# Altium PCB RaspberryPi_Pico.PcbDoc
Units mm, origin at the board's own origin, x right, y up, seen from the top; angles counter-clockwise.
Board outline 21 x 53.37 mm, 4 copper layers (Top Layer, Int1 (GND), Int2 (PWR), Bottom Layer), stack 1.334 mm thick; 52 components, 61 nets, 361 pads, 107 vias.
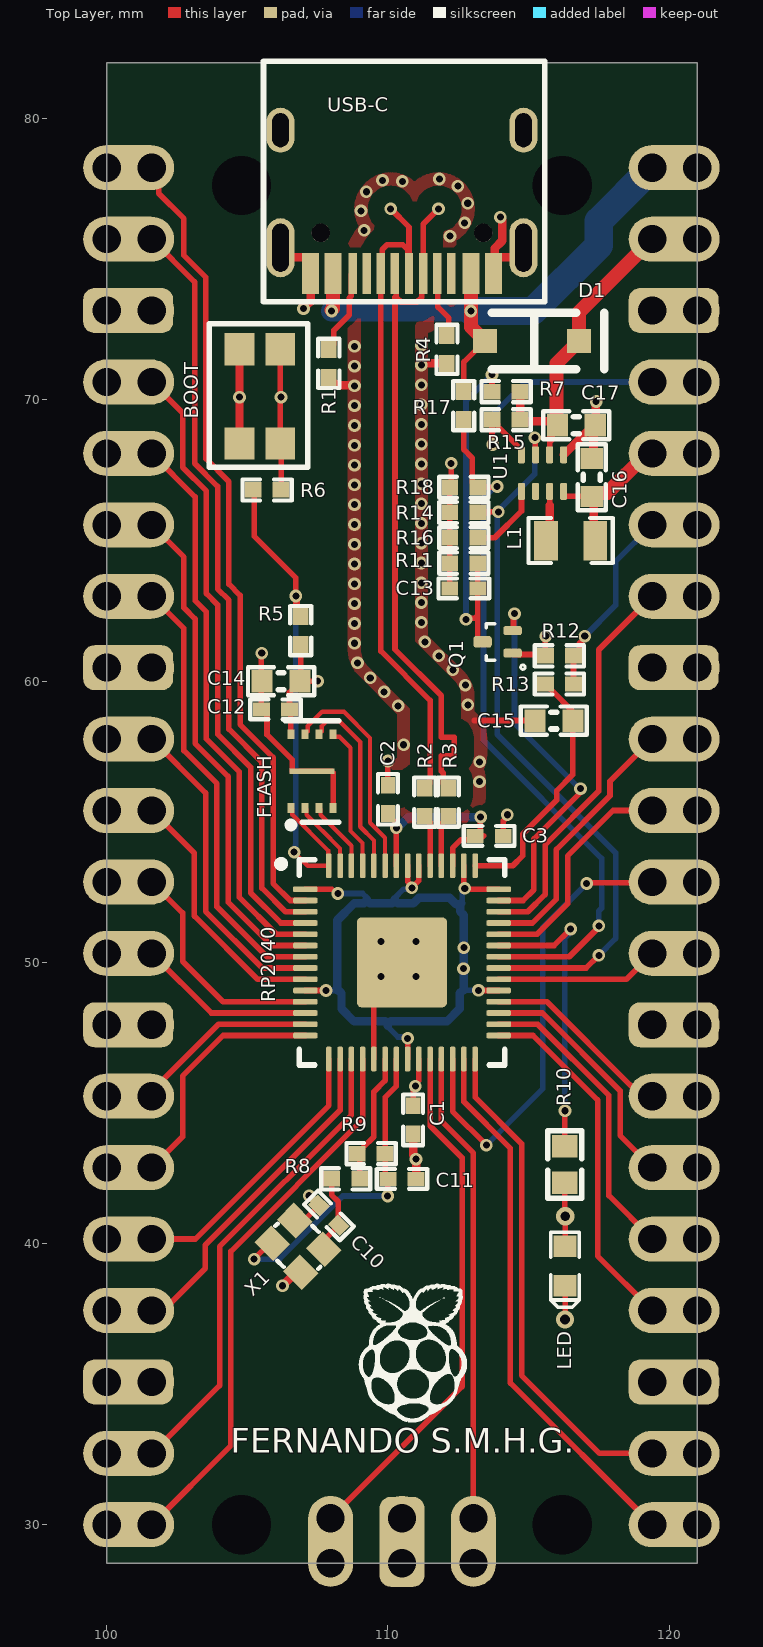
[diagram p0: Top Layer view]
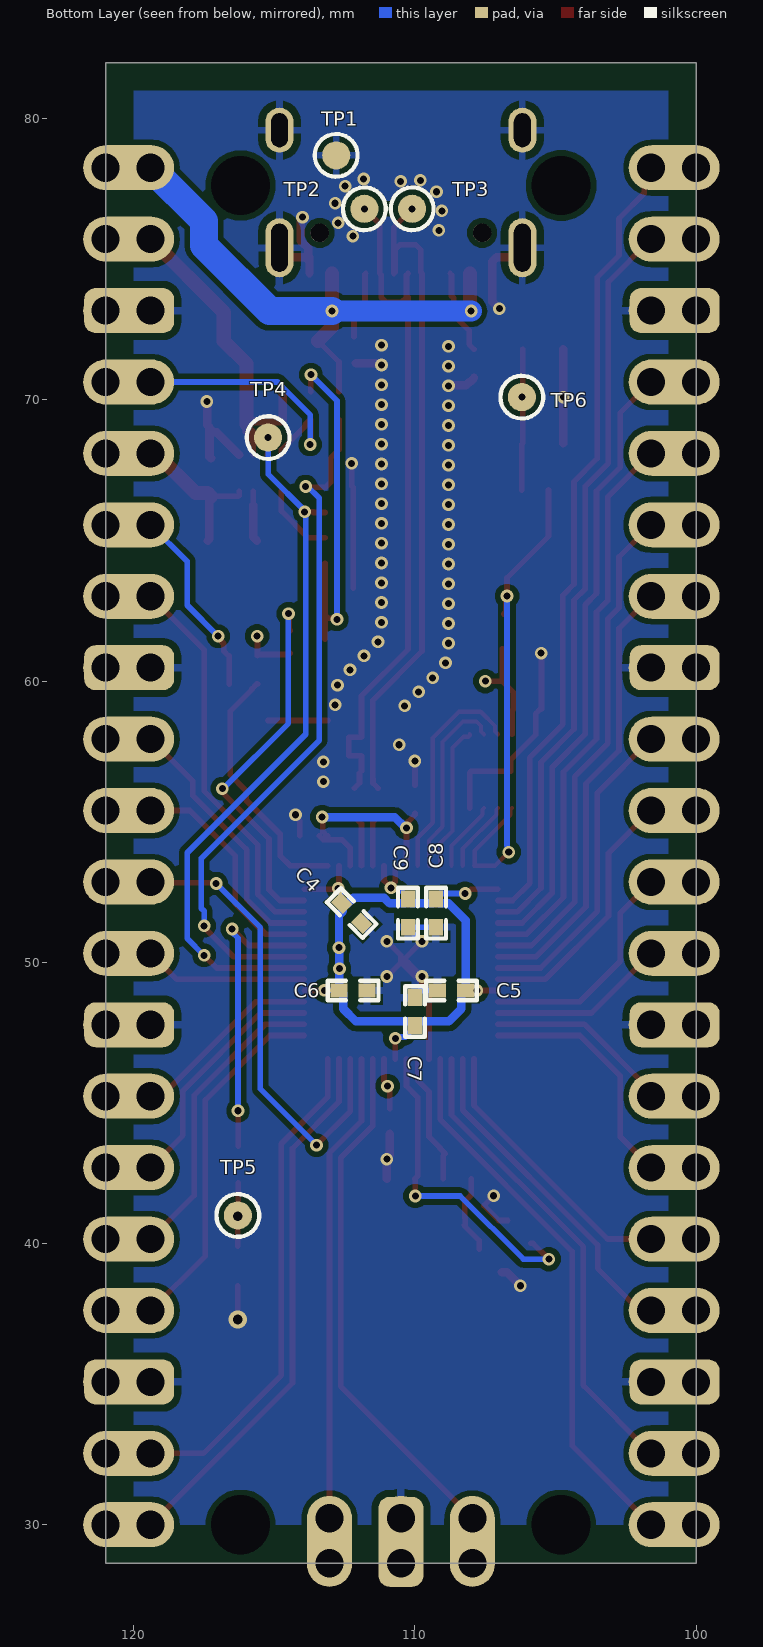
[diagram p1: Bottom Layer view, seen from below]
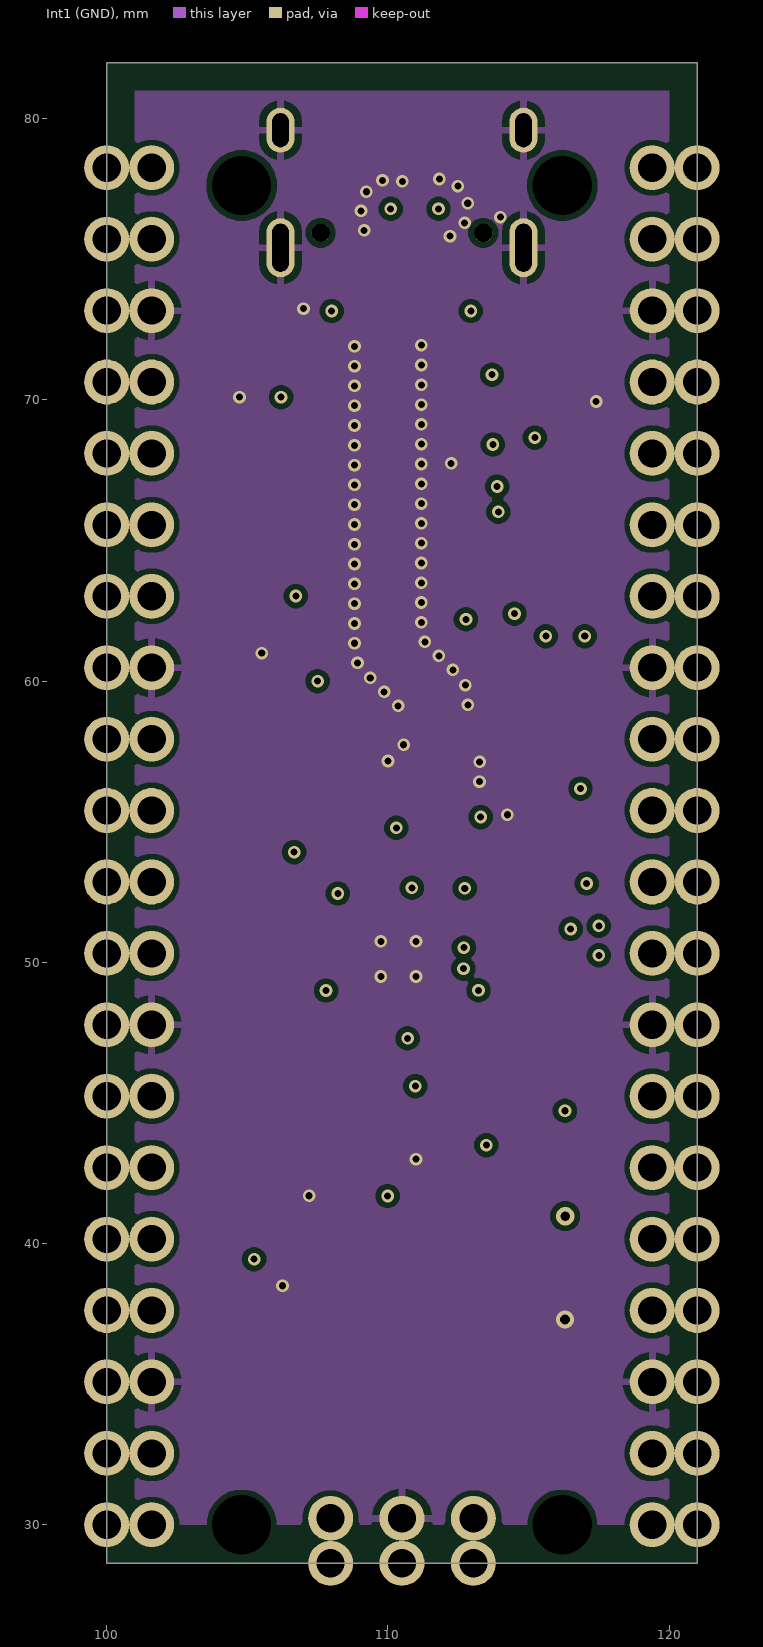
[diagram p2: Int1 (GND)]
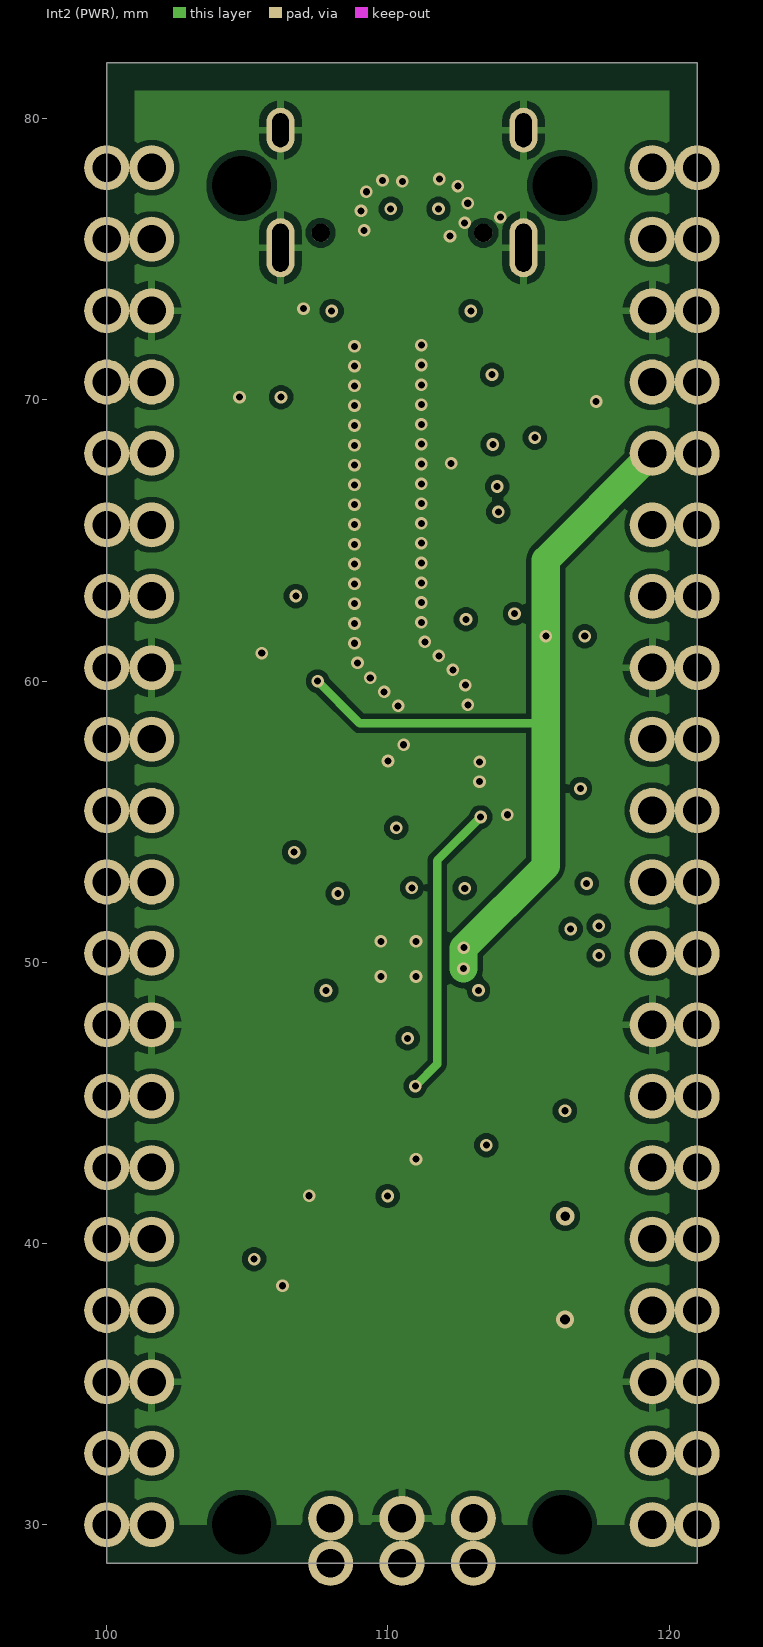
[diagram p3: Int2 (PWR)]
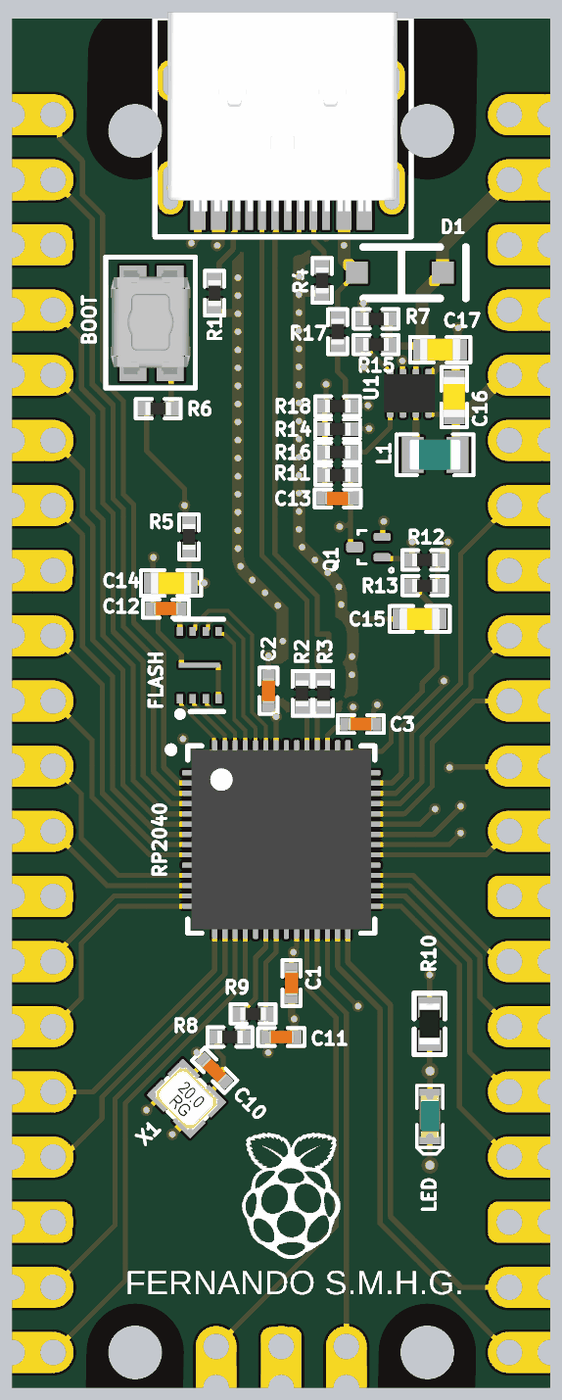
[diagram p4: 3D render of the assembled board from above, using the file's embedded part models]
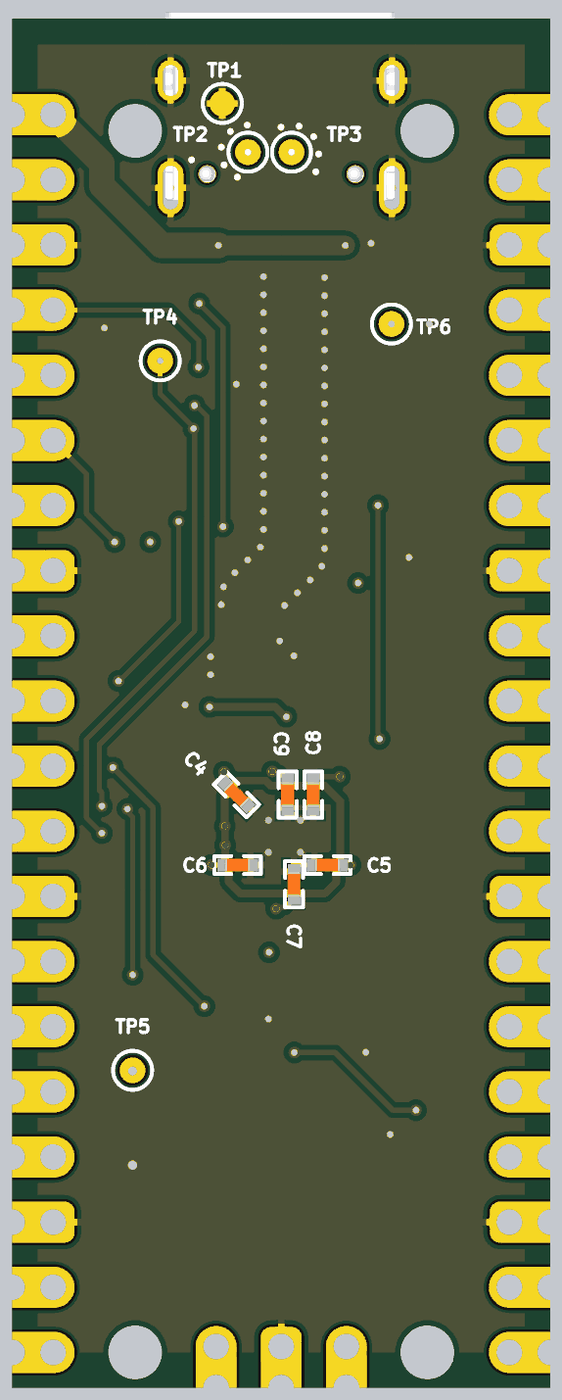
[diagram p5: 3D render of the assembled board from below, using the file's embedded part models]

## Layer stack, top to bottom
Top Solder: solder mask 0.0254, SM-001, Dk 4
Top Layer: signal copper 0.035
Dielectric 1: prepreg 0.1295, PP-017, Dk 4.3
Dielectric 2: prepreg 0.1295, PP-017, Dk 4.3
Int1 (GND): signal copper 0.0175
Dielectric 3: core 0.7112, Core-039, Dk 4.8
Int2 (PWR): signal copper 0.0175
Dielectric 4: prepreg 0.1295, PP-017, Dk 4.3
Dielectric 5: prepreg 0.1295, PP-017, Dk 4.3
Bottom Layer: signal copper 0.035
Bottom Solder: solder mask 0.0254, SM-001, Dk 4

## Board outline
100,28.63 100,82 121,82 121,28.63

## Design rules (kind name [scope] priority, off if disabled: settings)
Clearance Clearance_3 [InComponent('U1')] p1: gap=0.127 ignorepadtopadclearanceinfootprint=TRUE
Clearance Clearance_2 [InNet('VIN')] p2 off: gap=0.8 ignorepadtopadclearanceinfootprint=TRUE
Clearance Clearance_1 [All] p3: gap=0.2 ignorepadtopadclearanceinfootprint=TRUE
Clearance [All] p4 off: gap=0.2 ignorepadtopadclearanceinfootprint=TRUE
ComponentClearance [All] p1 off: gap=0.254 collisioncheckmode=3 verticalgap=0.254 showdistances=FALSE
DiffPairsRouting [InDifferentialPair('DiffPair')] p1: maxlimit=0.254 minlimit=0.089 mostfreqgap=0.2 toplayer_minwidth=0.089 toplayer_maxwidth=0.381 toplayer_prefwidth=0.15 midlayer1_minwidth=0.089 midlayer1_maxwidth=0.381 midlayer1_prefwidth=0.15 midlayer2_minwidth=0.089 midlayer2_maxwidth=0.381 midlayer2_prefwidth=0.15 bottomlayer_minwidth=0.089 bottomlayer_maxwidth=0.381 bottomlayer_prefwidth=0.15 maxuncoupledlength=12.7
HoleSize [All] p1: absolutevalues=TRUE maxlimit=6 minlimit=0.025 maxpercent=80.000 minpercent=20.000
MatchedLengths usb [All] p1 off: tolerance=1 checknetsindiffpair=FALSE checkdiffpairvsdiffpair=TRUE checkxsignals=TRUE checkothers=TRUE
MinimumSolderMaskSliver [All] p1 off: minsoldermaskwidth=0.254
PlaneClearance [All] p1: clearance=0.254
PolygonConnect VIN [InNet('VIN')] p1: connectstyle=Direct reliefconductorwidth=0.254 reliefentries=4 polygonreliefangle="90 Angle" airgapwidth=0.254
PolygonConnect Connectors [HasFootprint('B06B-JWPF-SK-R')] p2: connectstyle=Direct reliefconductorwidth=0.254 reliefentries=4 polygonreliefangle="90 Angle" airgapwidth=0.254
PolygonConnect Connectors_1 [HasFootprint('B08B-JWPF-SK-R')] p3: connectstyle=Direct reliefconductorwidth=0.254 reliefentries=4 polygonreliefangle="90 Angle" airgapwidth=0.254
PolygonConnect Default [All] p4 off: connectstyle=Relief reliefconductorwidth=0.254 reliefentries=4 polygonreliefangle="90 Angle" airgapwidth=0.254
PolygonConnect vbus [InNet('NetQ1_1')] p5: connectstyle=Direct reliefconductorwidth=0.254 reliefentries=4 polygonreliefangle="90 Angle" airgapwidth=0.254
PolygonConnect vbus_1 [InNet('NetC9_1')] p6: connectstyle=Direct reliefconductorwidth=0.254 reliefentries=4 polygonreliefangle="90 Angle" airgapwidth=0.254
PolygonConnect VIAS [IsVia] p7: connectstyle=Direct reliefconductorwidth=0 reliefentries=4 polygonreliefangle="90 Angle" airgapwidth=0
PolygonConnect PolygonConnect_1 [All] p8: connectstyle=Relief reliefconductorwidth=0.254 reliefentries=4 polygonreliefangle="90 Angle" airgapwidth=0.254
RoutingVias [All] p1: holewidth=0.3 width=0.5 viastyle="Through Hole" minholewidth=0.25 minwidth=0.45 maxholewidth=6.3 maxwidth=1.27
SilkToSilkClearance [All] p1 off: silktosilkclearance=0.254
SilkToSolderMaskClearance [IsPad] p1 off: minsilkscreentomaskgap=0.254 clearancetoexposedcopper=TRUE
SolderMaskExpansion SolderMaskExpansion_1 [IsVia] p1: expansion=0.102 istentingtop=TRUE
SolderMaskExpansion [All] p2: expansion=0.102 istentingtop=FALSE
Width [All] p1: maxlimit=1 minlimit=0.127 preferedwidth=0.2
23 further rules are at their usual default settings.

## Classes and differential pairs
differential pair P: +P_P -P_N

## Components (designator, comment, footprint, x,y, rotation, side; value= is the part's Value field where it differs from the comment)
BOOT "EVP-AA002K" MiniSwitch 106.172,68.453 r90 top
C1 "100nF" C0402 110.9,44.4 r90 top value=100pF
C2 "100nF" C0402 110,55.8 r270 top value=100pF
C3 "1uF" C0402 113.6,54.5 r180 top value=100pF
C4 "1uF" C0402 112.25,51.75 r45 bottom value=100pF
C5 "100nF" C0402 108.7,49 r180 bottom value=100pF
C6 "100nF" C0402 112.2,49 r0 bottom value=100pF
C7 "100nF" C0402 110,48.25 r270 bottom value=100pF
C8 "100nF" C0402 109.25,51.75 r90 bottom value=100pF
C9 "100nF" C0402 110.25,51.75 r90 bottom value=100pF
C10 "15pF" C0402 107.9,41 r135 top value=100pF
C11 "15pF" C0402 110.5,42.3 r0 top value=100pF
C12 "100nF" C0402 106,59 r0 top value=100pF
C13 "1nF" C0402 112.7,63.3 r0 top value=100pF
C14 "2.2uF" C0603 106.2,60 r0 top value=100pF
C15 "2.2uF" C0603 115.9,58.6 r0 top value=100pF
C16 "10uF" C0603 117.25,67.25 r270 top value=100pF
C17 "4.7uF" C0603 116.7,69.1 r180 top value=100pF
D1 "mbr120vlsft1g" SOD-123 113.45,72.1 r0 top locked
FLASH "GD25Q16CEIGR" GD25Q16CEIGR 106.55,55.488 r90 top
L1 "2.2uH" IND0805 116.5,65 r0 top value=120R/0.55A
LED "L0603G" LED_0603 116.3,39.2 r90 top
Q1 "dmg1012T" SOTFL3P40_120X120X55L30X32N 113.9,61.4 r180 top
R1 "5.1K" RES0402 107.9,71.3 r90 top value=0R
R2 "27.4R" RES0402 111.315,55.698 r90 top value=0R
R3 "27.4R" RES0402 112.149,55.698 r90 top value=0R
R4 "5.1K" RES0402 112.1,71.8 r270 top value=0R
R5 "DNP" RES0402 106.9,61.8 r270 top value=0R
R6 "1K" RES0402 105.7,66.8 r180 top value=0R
R7 "200K" RES0402 114.2,70.3 r0 top value=0R
R8 "1K" RES0402 108.5,42.3 r0 top value=0R
R9 "DNP" RES0402 109.4,43.2 r180 top value=0R
R10 "470R" RES0603R 116.287,42.811 r270 top value=0R
R11 "100K" RES0402 112.7,64.2 r0 top value=0R
R12 "200R" RES0402 116.1,60.9 r180 top value=0R
R13 "1R" RES0402 116.1,59.9 r180 top value=0R
R14 "100K" RES0402 112.7,66 r180 top value=0R
R15 "100K" RES0402 114.2,69.3 r0 top value=0R
R16 "267K" RES0402 112.7,65.1 r0 top value=0R
R17 "5.1K" RES0402 112.7,69.8 r90 top value=0R
R18 "5.1K" RES0402 112.7,66.9 r0 top value=0R
RP2040 "RP2040" RP2040 110.5,50 r0 top locked
RPI_PICO "DNP" "RPI PICO" 100,30 r0 top locked
TP1 "DNP" TP_SMD_1.0mm 112.8,78.7 r180 bottom
TP2 "DNP" TP_SMD_1.0mm 111.8,76.8 r90 bottom
TP3 "DNP" TP_SMD_1.0mm 110.1,76.8 r90 bottom
TP4 "DNP" TP_SMD_1.0mm 115.223,68.663 r0 bottom
TP5 "DNP" TP_SMD_1.0mm 116.3,41 r90 bottom
TP6 "DNP" TP_SMD_1.0mm 106.2,70.1 r90 bottom
U1 "TPS62840DLCR" TPS62840 115.5,67.4 r270 top
USB-C "TYPE-C-31-M-12" TYPE-C-31-M-12 113.75,74.5 r180 top locked
X1 "12MHz" XTAL_2016 106.8,39.9 r315 top value=32MHz

## Footprints (in the part's own frame and the unit in brackets; to place one, negate y for a bottom-side part, rotate by r counter-clockwise, add the part's x,y. Pads: shape width x height; smd on the part's side, far side on the other; paste and mask are expansions set on the pad)
C0402 [mm]
  rect 0.6x0.5 smd: 1(-0.5,0) 2(0.5,0)
  silkscreen extent -0.9,-0.35 0.9,0.35, body extent -0.51,-0.25 0.51,0.25, height 0.5
C0603 [mm]
  rect 0.75x0.8 smd: 1(-0.675,0) 2(0.675,0)
  silkscreen extent -1.17,-0.5 1.17,0.5, body extent -0.8,-0.44 0.8,0.43, height 0.8
GD25Q16CEIGR [mm] "Flash SPI USON8 Package"
  rect 0.35x0.25 smd: 1(0,0) 2(0,-0.5) 3(0,-1) 4(0,-1.5) 5(2.625,-1.5) 6(2.625,-1) 7(2.625,-0.5) 8(2.625,0)
  rect 0.2x1.6 smd: 4(1.312,-0.75)
  silkscreen extent -0.7,-1.7 3.1,0.2, body extent -0.18,-1.74 2.82,0.26, height 0.45
IND0805 [mm] "Inductor 0805 reflow soldering"
  rect 0.85x1.4 smd: 1(-0.875,0) 2(0.875,0)
  silkscreen extent -1.5,-0.8 1.5,0.8, body extent -1,-0.59 1,0.6, height 0.99
LED_0603 [mil]
  rect 30x32 smd: 1(-27.5,0) 2(27.5,0)
  silkscreen extent -58,-20 48,20, body extent -32,-16 32,16, height 24
MiniSwitch [mm]
  rect 1.15x1.05 smd: 1(0,1.45) 1(3.35,1.45) 2(0,0) 2(3.35,0)
  silkscreen extent -0.85,-0.98 4.25,2.52, body extent -0.43,-0.78 3.87,2.33, height 1.7
RES0402 [mm]
  rect 0.6x0.55 smd: 1(-0.5,0) 2(0.5,0)
  silkscreen extent -0.87,-0.38 0.88,0.38, body extent -0.5,-0.25 0.5,0.25, height 0.3
RES0603R [mm] "resistor 0603 reflow soldering"
  rect 0.8x0.9 smd: 1(-0.65,0) 2(0.65,0)
  silkscreen extent -1.2,-0.6 1.2,0.6, body extent -0.8,-0.4 0.8,0.4, height 0.45
RP2040 [mm]
  rrect50% 0.875x0.2 smd: 1(-3.437,2.6) 2(-3.437,2.2) 3(-3.437,1.8) 4(-3.437,1.4) 5(-3.437,1) 6(-3.437,0.6) 7(-3.437,0.2) 8(-3.437,-0.2) 9(-3.437,-0.6) 10(-3.437,-1) 11(-3.437,-1.4) 12(-3.437,-1.8) 13(-3.437,-2.2) 14(-3.437,-2.6) 29(3.437,-2.6) 30(3.437,-2.2) 31(3.437,-1.8) 32(3.437,-1.4) 33(3.437,-1) 34(3.437,-0.6) 35(3.437,-0.2) 36(3.437,0.2) 37(3.437,0.6) 38(3.437,1) 39(3.437,1.4) 40(3.437,1.8) 41(3.437,2.2) 42(3.437,2.6)
  rrect50% 0.2x0.875 smd: 15(-2.6,-3.437) 16(-2.2,-3.437) 17(-1.8,-3.437) 18(-1.4,-3.437) 19(-1,-3.437) 20(-0.6,-3.437) 21(-0.2,-3.437) 22(0.2,-3.437) 23(0.6,-3.437) 24(1,-3.437) 25(1.4,-3.437) 26(1.8,-3.437) 27(2.2,-3.437) 28(2.6,-3.437) 43(2.6,3.437) 44(2.2,3.437) 45(1.8,3.437) 46(1.4,3.437) 47(1,3.437) 48(0.6,3.437) 49(0.2,3.437) 50(-0.2,3.437) 51(-0.6,3.437) 52(-1,3.437) 53(-1.4,3.437) 54(-1.8,3.437) 55(-2.2,3.437) 56(-2.6,3.437)
  rrect10% 3.2x3.2 smd: 57(0,0)
  silkscreen extent -4.42,-3.65 3.65,3.65, body extent -3.5,-3.5 3.5,3.5, height 0.9
"RPI PICO" [mm] "PICO"
  round 1.6 hole 1: 1(0,48.26) 1(1.6,48.26) 2(0,45.72) 2(1.6,45.72) 3(0,43.18) 3(1.6,43.18) 4(0,40.64) 4(1.6,40.64) 5(0,38.1) 5(1.6,38.1) 6(0,35.56) 6(1.6,35.56) 7(0,33.02) 7(1.6,33.02) 8(0,30.48) 8(1.6,30.48) 9(0,27.94) 9(1.6,27.94) 10(0,25.4) 10(1.6,25.4) 11(0,22.86) 11(1.6,22.86) 12(0,20.32) 12(1.6,20.32) 13(0,17.78) 13(1.6,17.78) 14(0,15.24) 14(1.6,15.24) 15(0,12.7) 15(1.6,12.7) 16(0,10.16) 16(1.6,10.16) 17(0,7.62) 17(1.6,7.62) 18(0,5.08) 18(1.6,5.08) 19(0,2.54) 19(1.6,2.54) 20(0,0) 20(1.6,0) 21(19.4,0) 21(21,0) 22(19.4,2.54) 22(21,2.54) 23(19.4,5.08) 23(21,5.08) 24(19.4,7.62) 24(21,7.62) 25(19.4,10.16) 25(21,10.16) 26(19.4,12.7) 26(21,12.7) 27(19.4,15.24) 27(21,15.24) 28(19.4,17.78) 28(21,17.78) 29(19.4,20.32) 29(21,20.32) 30(19.4,22.86) 30(21,22.86) 31(19.4,25.4) 31(21,25.4) 32(19.4,27.94) 32(21,27.94) 33(19.4,30.48) 33(21,30.48) 34(19.4,33.02) 34(21,33.02) 35(19.4,35.56) 35(21,35.56) 36(19.4,38.1) 36(21,38.1) 37(19.4,40.64) 37(21,40.64) 38(19.4,43.18) 38(21,43.18) 39(19.4,45.72) 39(21,45.72) 40(19.4,48.26) 40(21,48.26) 41(7.96,-1.37) 41(7.96,0.23) 42(10.5,-1.37) 42(10.5,0.23) 43(13.04,-1.37) 43(13.04,0.23)
  oval 3.2x1.6 smd paste-1: 1(0.762,48.26) 2(0.762,45.72) 4(0.762,40.64) 5(0.762,38.1) 6(0.762,35.56) 7(0.762,33.02) 9(0.762,27.94) 10(0.762,25.4) 11(0.762,22.86) 12(0.762,20.32) 14(0.762,15.24) 15(0.762,12.7) 16(0.762,10.16) 17(0.762,7.62) 19(0.762,2.54) 20(0.762,0) 21(20.162,0) 22(20.162,2.54) 24(20.162,7.62) 25(20.162,10.16) 26(20.162,12.7) 27(20.162,15.24) 29(20.162,20.32) 30(20.162,22.86) 31(20.162,25.4) 32(20.162,27.94) 34(20.162,33.02) 35(20.162,35.56) 36(20.162,38.1) 37(20.162,40.64) 39(20.162,45.72) 40(20.162,48.26)
  oval 3.2x1.6 smd far side paste-1: 1(0.762,48.26) 2(0.762,45.72) 4(0.762,40.64) 5(0.762,38.1) 6(0.762,35.56) 7(0.762,33.02) 9(0.762,27.94) 10(0.762,25.4) 11(0.762,22.86) 12(0.762,20.32) 14(0.762,15.24) 15(0.762,12.7) 16(0.762,10.16) 17(0.762,7.62) 19(0.762,2.54) 20(0.762,0) 21(20.162,0) 22(20.162,2.54) 24(20.162,7.62) 25(20.162,10.16) 26(20.162,12.7) 27(20.162,15.24) 29(20.162,20.32) 30(20.162,22.86) 31(20.162,25.4) 32(20.162,27.94) 34(20.162,33.02) 35(20.162,35.56) 36(20.162,38.1) 37(20.162,40.64) 39(20.162,45.72) 40(20.162,48.26)
  rrect50% 3.2x1.6 smd paste-1: 3(0.762,43.18) 8(0.762,30.48) 13(0.762,17.78) 18(0.762,5.08) 23(20.162,5.08) 28(20.162,17.78) 33(20.162,30.48) 38(20.162,43.18)
  rrect50% 3.2x1.6 smd far side paste-1: 3(0.762,43.18) 8(0.762,30.48) 13(0.762,17.78) 18(0.762,5.08) 23(20.162,5.08) 28(20.162,17.78) 33(20.162,30.48) 38(20.162,43.18)
  oval 1.6x3.2 smd paste-1: 41(7.96,-0.608) 43(13.04,-0.608)
  oval 1.6x3.2 smd far side paste-1: 41(7.96,-0.608) 43(13.04,-0.608)
  rrect50% 1.6x3.2 smd paste-1: 42(10.5,-0.608)
  rrect50% 1.6x3.2 smd far side paste-1: 42(10.5,-0.608)
  round 1 hole 2.1 unplated: 44(4.8,0) 44(4.8,47.63) 44(16.2,0) 44(16.2,47.63)
SOD-123 [mm] "Diode"
  rect 0.85x0.85 smd: 1(0,0) 2(3.35,0)
  silkscreen extent 0.25,-1 4.25,1, body extent 0.25,-0.75 3.25,0.75, height 1.35
SOTFL3P40_120X120X55L30X32N [mm]
  rrect54% 0.66x0.32 smd: 1(-0.535,0.4) 2(-0.535,-0.4)
  rrect54% 0.66x0.42 smd: 3(0.535,0)
  silkscreen extent -0.98,-0.65 0.4,0.98, body extent -0.5,-0.7 0.4,0.6, height 0.6
TP_SMD_1.0mm [mm]
  round 1 smd paste-5: 1(0,0)
  silkscreen extent -0.76,-0.76 0.76,0.76
TPS62840 [mm]
  rrect40% 0.6x0.25 smd: 1(-0.65,0.75) 2(-0.65,0.25) 3(-0.65,-0.25) 4(-0.65,-0.75) 5(0.65,-0.75) 6(0.65,-0.25) 7(0.65,0.25) 8(0.65,0.75)
  body extent -0.75,-1 0.75,1, height 1
TYPE-C-31-M-12 [mm]
  rect 0.6x1.45 smd: 1(0,0) 1(6.5,0) 2(0.8,0) 2(5.7,0)
  rect 0.3x1.45 smd: 3(1.5,0) 4(2,0) 5(2.5,0) 6(3,0) 7(3.5,0) 8(4,0) 9(4.5,0) 10(5,0)
  oval 1x2.1 hole 1.7 slot 0.6 at 0 deg: 11(-1.07,-0.915) 11(7.57,-0.915)
  oval 1x1.6 hole 1.2 slot 0.6 at 0 deg: 11(-1.07,-5.095) 11(7.57,-5.095)
  round 0.65 hole 0.65: 12(0.36,-1.445) 12(6.14,-1.445)
  silkscreen extent -1.83,-7.55 8.18,1, body extent -1.27,-7.75 7.68,0, height 3.27
XTAL_2016 [mm]
  rect 0.95x0.85 smd: 1(-0.725,-0.575) 2(0.725,-0.575) 3(0.725,0.575) 4(-0.725,0.575)
  silkscreen extent -1.08,-0.88 1.08,0.88, body extent -1.05,-0.85 1.05,0.85, height 0.56

## Part data
BOOT: library part SwitchMini, "EVPAA002K = 1.0 N, EVPAAU02Q = 7.0 N", Supplier Part Number 1=P13347SCT-ND, Supplier 1=Digi-Key
C1 C2 C3 C4 C5 C6 C7 C8 C9 C10 C11 C12 C13 C14 C15 C16 C17: library part CAP, "Capacitor", Published=8-Jun-2000, Publisher="Altium Limited", Revision="July-2002: Re-released for DXP Platform."
D1: library part Diode, "Switch-mode Schottky / Power Rectifier / 250 V, 40 A"
FLASH: library part "Flash SPI", "Flash SPI 16Mb = 2 MB", Supplier Part Number 1=363-GD25Q16CEIGR, Supplier 1=Mouser
L1: "Inductor", Manufacturer=Murata, Manufacturer Part Number=BLM15AG121SN1D, Part Number=FB0402-120R@100M-500mA, Part number IPS=N.A., Artikkelnr Noca=33029317, ComponentLink1Description=Datasheet, ComponentLink2Description="Supplier link", Footprint Doc=0402, HelpURL=http://search.murata.co.jp/Ceramy/image/img/PDF/ENG/L0110S0100BLM15A_SN.pdf, LatestRevisionDate=2014-01-10, Note="Chip EMIFIL Inductor Type Chip Ferrite Bead", Pin Count=2, Published=2011-11-14, Publisher="Nordic Semiconductor"
LED: "LED, Green, 0603, 570nm, Vf=1.7V, 2.24..5.6mcd, - 40 to +100Â°C", Manufacturer=Osram, Manufacturer Part Number="LG L29K-G2J1-24-Z", Part Number="LG L29K Smartled Green", Part number IPS=N.A., Supplier Part Number 1=475-2709-1-ND, Artikkelnr Noca=13019147, ComponentLink1Description=Datasheet, ComponentLink2Description="Supplier link", Footprint Doc=0603, HelpURL=http://www.osram-os.com/Graphics/XPic2/00077107_0.pdf, LatestRevisionDate=2017-08-21, Note="2.24..5.6 mcd, Vfmin=1.7V", Pin Count=2, Published=2014-10-28, Publisher="Nordic Semiconductor", Supplier 1=Digi-Key, Supplier 2=Mouser, Supplier Part Number 2=720-LGL29KG2J124Z
Q1: library part Transistor, "N-Channel 20V 100mA _Ta_ 150mW _Ta_ Surface Mount VMT3", Package="SOT-723 Rohm", Digi-Key_Part_Number=RUM001L02T2CLCT-ND, Digi-Key_Purchase_URL=https://www.digikey.com/product-detail/en/rohm-semiconductor/RUM001L02T2CL/RUM001L02T2CLCT-ND/4571412?utm_source=snapeda&utm_medium=aggregator&utm_campaign=symbol, MF=Rohm, MP=RUM001L02T2CL, SnapEDA_Link=https://www.snapeda.com/parts/RUM001L02T2CL/Rohm/view-part/531428/?ref=snap
R1 R2 R3 R4 R5 R6 R7 R8 R9 R10 R11 R12 R13 R14 R15 R16 R17 R18: "Resistor, Â±5%, 0.05W", Part Number=R0201-0R, Part number IPS=00000003245, Artikkelnr Noca=N.A., ComponentLink1Description=Datasheet, ComponentLink2Description="Supplier link", Footprint Doc=0201, LatestRevisionDate=2017-11-09, Note="Chip Res 5%", Pin Count=2, Published=2014-11-13, Publisher="Nordic Semiconductor"
RP2040: "RP2040 First MCU from RPI"
RPI_PICO: library part RPI_PICO, "RPI_PICO"
TP1 TP2 TP3 TP4 TP5 TP6: library part TP
U1: library part TPS62840, "Ultra low IQ Step Down Converter, DLC0008A (VSON-HR-8)", Alternate Manufacturer="Texas Instruments", Operating Temperature Range="-40 to 125 C", Supplier Part Number 1=595-TPS62840DLCR, AEC Category=Q200, AEC Qualified=N, ComponentLink1Description="Datasheet Link", ComponentLink1URL=http://www.ti.com/lit/ds/symlink/tps62840.pdf, ComponentLink2Description="Product Folder", ComponentLink2URL=http://www.ti.com/product/tps62840, ComponentLink3Description="Online Datasheet", ComponentLink3URL=http://www.ti.com/product/tps62840/datasheet, CompType=IC, Manufacturer="Texas Instruments", MountType=SMT, PackageDescription=VSON-HR-8, PackageReference=DLC0008A, PartNumber=TPS62840DLCR, SizeArea_mm2=3, SizeAreaWB_mm2=7.5, SizeX_mm=1.5, SizeY_mm=2, SizeZ_mm=1, Supplier 1=Mouser
USB-C: library part USB-C, "USB C connector", ComponentLink1Description=LCSC, ComponentLink1URL=https://lcsc.com/product-detail/USB-Connectors_Korean-Hroparts-Elec-TYPE-C-31-M-12_C165948.html
X1: "XTAL SMD 2016, 32MHz, Cl=8pF, Total Tol: Â±40ppm", Part Number=XTAL_SMD2016_32MHz_8pF_General, Footprint Doc=XTAL_2016, LatestRevisionDate=2016-08-19, Pin Count=4, Published=2016-08-19, Publisher="Nordic Semiconductor"

## Via types
v1: diameter 0.45, hole 0.25, Top Layer to Bottom Layer, tented both sides, 105 vias
v2: diameter 0.65, hole 0.35, Top Layer to Bottom Layer, tented both sides, 2 vias

## Nets (pads, with @x,y where several pads share a name; then routed paths per layer and width w, separated by ;. In a path a pad name is that pad's centre, name@x,y a point inside that pad or via, vN(x,y) a via of type N, cw(c..) or ccw(c..) an arc to the next point about the centre after c; other vN are vias at no path point)
1V1: C1.2 C2.2 C3.2 RP2040.23 RP2040.45 RP2040.50 | length 20.2
  Top Layer w0.2: C2.2 110,55.25 110.252,54.998 110.252,54.834 v1(110.3,54.786) RP2040.50 ; C1.2@110.9,44.8 C1.2 110.9,45.457 110.975,45.532 v1(110.975,45.6) 110.975,45.668 111.1,45.793 RP2040.23 ; RP2040.45 112.3,54.062 112.605,54.367 113.267,54.367 113.4,54.5 ; C3.2 113.127,54.5 113.277,54.65 113.277,55.145 v1(113.3,55.167)
  Int2 (PWR) w0.3: v1(110.975,45.6) 111.75,46.375 111.75,53.617 v1(113.3,55.167)
  Bottom Layer w0.3: v1(110.3,54.786) 110.341,54.786 110.722,55.167 v1(113.3,55.167)
3V3: C4.2 C5.2 C6.2 C7.2 C8.2 C9.2 C12.2 C14.2 C16.2 FLASH.8 L1.2 Q1.1 R5.2 R12.2 RP2040.1 RP2040.10 RP2040.22 RP2040.33 RP2040.42 RP2040.44 RP2040.48 RP2040.49 RPI_PICO.36 U1.8 | length 69.6
  Top Layer w0.2: FLASH.8 106.55,58.95 C12.2 106.5,59.6 106.875,59.975 C14.2 ; R5.2@106.9,61.15 106.9,60.025 C14.2 ; RP2040.10 v1(107.8,49) ; RP2040.1 108,52.6 ; v1(107.5,60) C14.2 ; RP2040.22 v1(110.7,47.3) ; RP2040.49 110.7,52.872 110.852,52.72 v1@110.852,52.657 ; v1(110.852,52.652) v1@110.852,52.657 ; RP2040.48 111.1,52.905 v1@110.852,52.657 ; RP2040.44 112.7,52.667 v1(112.732,52.635) 112.767,52.6 RP2040.42 ; v1(113.223,49.005) 113.228,49 RP2040.33 ; Q1.1 114.485,60.95 115.55,60.95 R12.2 115.6,61.687 v1@115.614,61.701 ; U1.8 116.25,66.6 116.275,66.575 C16.2
  Top Layer w0.3: C16.2 117.312,66.513 117.312,65.063 L1.2
  Top Layer w0.5: C16.2 117.375,66.7 117.808,66.7 119.208,68.1 RPI_PICO.36@119.4,68.1
  Int2 (PWR) w0.3: v1(107.5,60) 109,58.5 115.364,58.5 115.614,58.75
  Int2 (PWR) w1: v1(112.686,49.775) 112.686,50.507 115.614,53.435 115.614,58.75 v1(115.614,61.6) 115.614,64.314 RPI_PICO.36@119.4,68.1
  Bottom Layer w0.2: v1(107.8,49) C5.2 ; v1(108.218,52.45) 109.1,52.45 109.25,52.3 C8.2 ; C7.2 110,47.7 110.352,47.348 110.652,47.348 v1(110.7,47.3) ; C7.2@110,47.8 110.1,47.9 C7.2@110.15,47.95 ; C9.2 110.25,52.3 110.554,52.604 110.804,52.604 v1(110.852,52.652) ; C4.2 112.639,52.139 112.639,52.475 112.732,52.568 v1(112.732,52.635) ; C6.2@112.703,49.003 113.22,49.003 v1(113.223,49.005)
  Bottom Layer w0.3: C8.2 C8.2@109.25,52.2 ; C7.2 110,47.8 109.9,47.9 109.85,47.9 108.8,47.9 108.35,48.35 108.35,48.9 108.25,49 C5.2 108.2,51.5 108.8,52.1 109.15,52.1 C8.2@109.25,52.2 ; C7.2@110.1,47.9 110.15,47.9 112.1,47.9 112.55,48.35 112.55,48.9 112.65,49 112.675,49 C6.2 112.693,49.007 112.693,49.768 112.694,49.769 112.694,50.515 v1(112.703,50.524) 112.703,51.677 112.568,51.811 C4.2@112.568,52.068 ; C9.2 C9.2@110.25,52.2 ; C4.2 C4.2@112.568,52.068 ; C8.2@109.25,52.2 109.35,52.1 110.15,52.1 C9.2@110.25,52.2 ; C9.2@110.25,52.2 110.35,52.1 110.9,52.1 111.1,52.3 112.195,52.3 112.303,52.192 112.427,52.068 C4.2@112.568,52.068
A0: RP2040.38 RPI_PICO.31 | length 8.3
  Top Layer w0.2: RP2040.38 115.305,51 116.389,52.084 116.389,53.778 118.011,55.4 RPI_PICO.31@119.4,55.4
A1: RP2040.39 RPI_PICO.32 | length 9.5
  Top Layer w0.2: RP2040.39 115.139,51.4 115.989,52.25 115.989,54.013 117.9,55.924 117.9,56.44 RPI_PICO.32@119.4,57.94
A2: RP2040.40 RPI_PICO.34 | length 14.1
  Top Layer w0.2: RP2040.40 114.974,51.8 115.589,52.415 115.589,54.179 117.5,56.09 117.5,61.12 RPI_PICO.34@119.4,63.02
A3: Q1.2 RP2040.41 | length 13.5
  Top Layer w0.2: RP2040.41 114.808,52.2 115.189,52.581 115.189,54.389 v1@116.9,56.1 ; Q1.2 114.468,61.832 114.468,62.368 v1(114.5,62.4)
  Bottom Layer w0.2: v1(114.5,62.4) 114.5,58.5 116.82,56.18 v1(116.848,56.18)
ENABLE: R15.1 RPI_PICO.37 U1.4 | length 9.8
  Top Layer w0.2: v1(113.729,68.416) 113.7,68.445 R15.1 113.725,69.3 113.9,69.125 113.9,69.075 114.75,68.225 U1.4
  Bottom Layer w0.2: v1(113.729,68.416) 113.718,68.427 113.718,69.468 114.89,70.64 RPI_PICO.37@119.4,70.64
GND: BOOT.1 C1.1 C2.1 C3.1 C4.1 C5.1 C6.1 C7.1 C8.1 C9.1 C10.2 C11.2 C12.1 C13.1 C14.1 C15.1 C16.1 C17.1 FLASH.4 LED.1 R1.1 R4.2 R11.1 R14.2 R16.1 R18.1 RP2040.19 RP2040.57 RPI_PICO.3 RPI_PICO.8 RPI_PICO.13 RPI_PICO.18 RPI_PICO.23 RPI_PICO.28 RPI_PICO.33 RPI_PICO.38 RPI_PICO.42 TP1.1 U1.1 USB-C.1 USB-C.11 X1.2 X1.4 | length 47.7
  Top Layer w0.2: v1(105.513,60.997) 105.5,60.985 C12.1 105.55,59 105.7,58.85 105.7,58.1 106.6,57.2 106.6,56.8 107.3,56.8 108,56.8 108.05,56.75 FLASH.4@108.05,55.488 ; X1.4 107.012,40.819 C10.2 v1(107.2,41.7) ; RP2040.19 109.5,49 RP2040.57 ; v1(109.75,49.5) 110.25,50 RP2040.57 ; v1(109.75,50.75) RP2040.57 ; C2.1 110,57.156 v1(110.005,57.161) ; v1(111,49.5) RP2040.57 ; v1(111,50.75) 110.5,50.25 RP2040.57 ; C13.1 R11.1 R16.1 R18.1 112.25,66.95 v1(112.25,67.75) ; 113.081,58.6 C15.1 ; C3.1 114.1,55.032 114.25,55.182 v1(114.25,55.25) ; v2(116.3,37.3) LED.1 ; C16.1 117.25,68.95 117.312,69.012 C17.1@117.375,69.075
  Top Layer w0.3: BOOT.1@104.722,68.453 v1(104.722,70.1) BOOT.1@104.722,71.803 ; USB-C.11@106.18,75.415 106.18,75.398 106.503,75.075 107.1,75.075 107.25,74.925 107.25,74.5 107.25,73.5 v1(107,73.25) ; v1(106.25,38.5) 106.731,38.981 X1.2 ; R1.1 107.9,70.775 108.025,70.65 108.05,70.65 108.17,70.53 108.781,70.53 v1(108.81,70.501) ; C1.1 110.9,43.141 111,43.041 v1(111,43) C11.2 ; v1(111.19,71.244) 111.231,71.244 111.287,71.3 R4.2 ; USB-C.1@113.75,74.5 113.75,75.075 113.793,75.075 113.793,75.393 114.065,75.665 114.065,76.394 114,76.459 v1(114,76.5) ; USB-C.1@113.75,74.925 113.9,75.075 114.497,75.075 114.82,75.398 USB-C.11@114.82,75.415 ; U1.1 117.05,68.85 117.15,68.85 C17.1@117.25,68.95 ; C16.1 117.312,67.987 117.312,69.012 117.312,69.037 C17.1 ; C17.1@117.375,69.075 C17.1 ; v1(117.403,69.948) 117.389,69.934 117.389,69.114 C17.1
  Bottom Layer w0.2: C5.1 109.8,49 110,48.8 C7.1 ; C8.1 C9.1 110.25,51.2 109.8,50.75 v1(109.75,50.75)
  other v1: 113.256,56.425 113.261,57.129 110.56,57.739 110.367,59.121 112.84,59.159 109.869,59.618 112.754,59.857 109.371,60.116 112.309,60.403 108.916,60.653 111.812,60.901 108.81,61.349 111.314,61.399 108.81,62.053 111.19,62.092 108.81,62.757 111.19,62.796 108.81,63.461 111.19,63.5 108.81,64.165 111.19,64.204 108.81,64.869 111.19,64.908 108.81,65.573 111.19,65.612 108.81,66.277 111.19,66.316 108.81,66.981 111.19,67.02 108.81,67.685 111.19,67.724 108.81,68.389 111.19,68.428 108.81,69.093 111.19,69.132 108.81,69.797 111.19,69.836 111.19,70.54 108.81,71.205 108.81,71.909 111.19,71.948 112.21,75.826 109.154,76.033 112.73,76.302 109.044,76.728 112.839,76.997 109.234,77.406 112.484,77.606 110.51,77.774 109.807,77.814 111.827,77.858
GP0: RP2040.2 RPI_PICO.1 | length 28.7
  Top Layer w0.2: RPI_PICO.1@101.6,78.23 101.6,78.26 101.846,78.014 101.846,77.351 102.743,76.454 102.743,75.143 103.524,74.362 103.524,67.914 104.344,67.095 104.344,63.45 104.743,63.05 104.743,58.459 105.918,57.284 105.918,52.807 106.525,52.2 RP2040.2
GP1: RP2040.3 RPI_PICO.2 | length 26.6
  Top Layer w0.2: RPI_PICO.2@101.6,75.72 103.124,74.196 103.124,67.749 103.943,66.93 103.943,63.285 104.343,62.884 104.343,58.293 105.518,57.118 105.518,52.641 106.359,51.8 RP2040.3
GP2: RP2040.4 RPI_PICO.4 | length 22
  Top Layer w0.2: RPI_PICO.4@101.6,70.64 102.705,69.535 102.705,67.602 103.543,66.764 103.543,63.119 103.943,62.719 103.943,58.116 105.118,56.941 105.118,52.476 106.194,51.4 RP2040.4
GP3: RP2040.5 RPI_PICO.5 | length 20
  Top Layer w0.2: RPI_PICO.5@101.6,68.1 103.143,66.557 103.143,62.865 103.543,62.465 103.543,57.95 104.718,56.776 104.718,52.31 106.028,51 RP2040.5
GP4: RP2040.6 RPI_PICO.6 | length 17.9
  Top Layer w0.2: RPI_PICO.6@101.6,65.56 102.743,64.417 102.743,62.611 103.143,62.211 103.143,57.785 104.318,56.61 104.318,52.144 105.862,50.6 RP2040.6
GP5: RP2040.7 RPI_PICO.7 | length 15.9
  Top Layer w0.2: RPI_PICO.7@101.6,63.02 102.743,61.877 102.743,57.531 103.918,56.356 103.918,51.979 105.697,50.2 RP2040.7
GP6: RP2040.8 RPI_PICO.9 | length 11.3
  Top Layer w0.2: RPI_PICO.9@101.6,57.94 103.518,56.022 103.518,51.813 105.531,49.8 RP2040.8
GP7: RP2040.9 RPI_PICO.10 | length 9.3
  Top Layer w0.2: RPI_PICO.10@101.6,55.4 103.118,53.882 103.118,52.807 103.118,51.647 105.365,49.4 RP2040.9
GP8: RP2040.11 RPI_PICO.11 | length 8.2
  Top Layer w0.2: RPI_PICO.11@101.6,52.86 102.7,51.76 102.7,50.04 104.14,48.6 RP2040.11
GP9: RP2040.12 RPI_PICO.12 | length 6.3
  Top Layer w0.2: RPI_PICO.12@101.6,50.32 103.72,48.2 RP2040.12
GP10: RP2040.13 RPI_PICO.14 | length 6.6
  Top Layer w0.2: RPI_PICO.14@101.6,45.24 101.6,45.426 103.974,47.8 RP2040.13
GP11: RP2040.14 RPI_PICO.15 | length 8.7
  Top Layer w0.2: RPI_PICO.15@101.6,42.7 102.7,43.8 102.7,45.96 104.14,47.4 RP2040.14
GP12: RP2040.15 RPI_PICO.16 | length 9.9
  Top Layer w0.2: RPI_PICO.16@101.6,40.16 103.152,40.16 107.9,44.908 RP2040.15
GP13: RP2040.16 RPI_PICO.17 | length 12
  Top Layer w0.2: RPI_PICO.17@101.6,37.62 102.01,37.62 103.505,39.115 103.505,39.947 108.3,44.742 RP2040.16
GP14: RP2040.17 RPI_PICO.19 | length 17
  Top Layer w0.2: RPI_PICO.19@101.6,32.54 104.013,34.953 104.013,39.89 108.7,44.577 RP2040.17
GP15: RP2040.18 RPI_PICO.20 | length 19.7
  Top Layer w0.2: RPI_PICO.20@101.6,30 104.413,32.813 104.413,39.724 109.1,44.411 RP2040.18
GP16: RP2040.27 RPI_PICO.21 | length 19.3
  Top Layer w0.2: RP2040.27 112.7,45.042 114.357,43.385 114.357,35.043 RPI_PICO.21@119.4,30
GP17: RP2040.28 RPI_PICO.22 | length 17.7
  Top Layer w0.2: RP2040.28 113.1,45.208 114.757,43.551 114.757,35.306 117.523,32.54 RPI_PICO.22@119.4,32.54
GP18: RP2040.29 RPI_PICO.24 | length 12.8
  Top Layer w0.2: RP2040.29 115.16,47.4 117.456,45.104 117.456,39.564 RPI_PICO.24@119.4,37.62
GP19: RP2040.30 RPI_PICO.25 | length 10.7
  Top Layer w0.2: RP2040.30 115.326,47.8 117.856,45.27 117.856,41.704 RPI_PICO.25@119.4,40.16
GP20: RP2040.31 RPI_PICO.26 | length 8.7
  Top Layer w0.2: RP2040.31 115.491,48.2 118.256,45.435 118.256,43.844 RPI_PICO.26@119.4,42.7
GP21: RP2040.32 RPI_PICO.27 | length 6.9
  Top Layer w0.2: RP2040.32 115.657,48.6 118.631,45.626 118.635,45.626 119.021,45.24 RPI_PICO.27@119.4,45.24
GP22: RP2040.34 RPI_PICO.29 | length 5.8
  Top Layer w0.2: RP2040.34 118.48,49.4 RPI_PICO.29@119.4,50.32
GP23: R14.1 RP2040.35 TP4.1 U1.3 | length 26.1
  Top Layer w0.2: R14.1 113.6,66 113.624,66.024 v1(113.925,66.024) ; RP2040.35 117.05,49.8 v1(117.5,50.25) ; v1(115.223,68.663) 115.236,68.649 115.236,68.064 U1.3
  Bottom Layer w0.2: v1@113.885,66.024 115.223,67.362 v1(115.223,68.663) ; v1(113.925,66.024) 113.885,65.984 113.885,58.115 118.1,53.9 118.1,50.85 v1(117.5,50.25)
GP24: R17.1 R18.2 RP2040.36 | length 25
  Top Layer w0.2: R17.1 112.7,68.238 113,67.937 113,67.075 113.175,66.9 R18.2 113.861,66.9 v1(113.885,66.924) ; RP2040.36 116.45,50.2 117.5,51.25 v1(117.5,51.3)
  Bottom Layer w0.2: v1(113.885,66.924) 113.817,66.924 113.4,66.507 113.4,57.9 117.6,53.7 117.6,51.925 117.5,51.825 v1(117.5,51.3)
GP25: R10.1 RP2040.37 | length 10.6
  Top Layer w0.2: RP2040.37 115.911,50.6 v1(116.5,51.189) ; R10.1 116.287,44.715 v1(116.295,44.723)
  Bottom Layer w0.2: v1(116.295,44.723) 116.295,50.863 116.5,51.067 v1(116.5,51.189)
NetBOOT_2: BOOT.2 R6.1 TP6.1 | length 5
  Top Layer w0.2: BOOT.2@106.172,71.803 106.172,68.453 106.2,68.425 R6.1
  other v1: 106.2,70.1
NetC10_1: C10.1 R8.1 X1.3 | length 2.8
  Top Layer w0.2: X1.3 107.719,40.112 C10.1 108.218,40.682 108.218,40.894 108.235,40.911 108.235,41.49 108,41.725 R8.1
NetC13_2: C13.2 Q1.3 R7.1 R11.2 | length 12.9
  Top Layer w0.2: v1(112.775,62.2) 112.81,62.235 113.083,62.235 113.2,62.352 ; Q1.3@113.2,61.5 113.2,62.352 ; R11.2 113.2,62.352 ; R7.1 v1(113.7,70.9)
  Bottom Layer w0.2: v1(112.775,62.2) 112.775,69.975 v1(113.7,70.9)
NetC15_2: C15.2 R13.2 RP2040.43 | length 9.1
  Top Layer w0.2: RP2040.43 114.437,53.437 114.789,53.789 114.789,54.555 116,55.766 116,56.1 116.575,56.675 116.575,58.3 116.575,58.926 115.8,59.701 115.8,59.725 115.625,59.9 R13.2
NetL1_1: L1.1 U1.7 | length 1.8
  Top Layer w0.2: 115.75,66.25 U1.7
  Top Layer w0.3: L1.1 115.75,65.125 115.75,66.25
NetLED_2: LED.2 R10.2 TP5.1 | length 2.3
  Top Layer w0.2: R10.2 116.287,40.989 v2(116.304,40.972) 116.304,39.902 LED.2
NetR1_2: R1.2 USB-C.10 | length 3.1
  Top Layer w0.2: R1.2 108.075,71.975 108.075,72.475 108.625,73.025 108.625,73.626 108.7,73.701 108.7,74.45 USB-C.10
NetR4_1: R4.1 USB-C.4 | length 2.4
  Top Layer w0.2: USB-C.4 111.775,74.475 111.775,73.307 112.169,72.913 R4.1@112.169,72.256
NetR16_2: R16.2 U1.5 | length 2.6
  Top Layer w0.2: R16.2 113.8,65.1 114.75,66.05 U1.5
P_N: R3.2 TP2.1 USB-C.5 USB-C.7 | length 24.5
  Top Layer w0.2: 110.25,73.651 110.25,61.133 111.9,59.483 111.9,59.1 111.9,58.008 112.353,58.008 112.353,57.354 111.9,57.354 111.9,56.8 111.974,56.726 111.974,56.6 111.974,56.373 R3.2 ; USB-C.7 110.3,74.45 110.3,73.651 110.476,73.475 111.024,73.475 111.2,73.651 111.2,74.45 USB-C.5 111.25,76.25 v1(111.8,76.8)
P_P: R2.2 TP3.1 USB-C.6 USB-C.8 | length 24.5
  Top Layer w0.2: v1(110.1,76.8) 110.75,76.15 USB-C.6 110.7,74.55 110.7,75.349 110.524,75.525 109.976,75.525 109.8,75.349 109.8,74.55 USB-C.8 109.75,61.067 111.5,59.317 111.5,56.516 111.49,56.506 111.49,56.373 R2.2
QSPI_SCLK: FLASH.6 RP2040.52 | length 6.7
  Top Layer w0.15: FLASH.6 107.65,58.212 107.65,58.401 107.811,58.563 108.289,58.563 109.017,57.835 109.017,54.822 109.5,54.339 RP2040.52
QSPI_SD0: FLASH.5 RP2040.53 | length 5.2
  Top Layer w0.15: FLASH.5 108.05,58.072 108.1,58.022 108.278,58.022 108.667,57.633 108.667,54.677 109.1,54.244 RP2040.53
QSPI_SD1: FLASH.2 RP2040.55 | length 2.6
  Top Layer w0.15: FLASH.2 107.1,55.438 107.1,55.249 107.661,54.688 107.666,54.688 108.3,54.054 RP2040.55
QSPI_SD2: FLASH.3 RP2040.54 | length 2.5
  Top Layer w0.15: FLASH.3 107.6,55.438 107.6,55.249 107.811,55.037 108.7,54.149 RP2040.54
QSPI_SD3: FLASH.7 RP2040.51 | length 7.9
  Top Layer w0.15: FLASH.7 107.15,58.213 107.15,58.401 107.661,58.913 108.434,58.913 109.367,57.98 109.367,54.967 109.9,54.434 RP2040.51
QSPI_SS: FLASH.1 R5.1 R6.2 RP2040.56 | length 18.9
  Top Layer w0.15: FLASH.1 106.6,55.438 106.6,55.249 107.875,53.974 107.875,53.462 RP2040.56 107.149,53.437 v1(106.664,53.922)
  Top Layer w0.2: R6.2@105.25,66.8 105.25,65.15 106.725,63.675 v1(106.725,63.028) ; v1(106.725,63.028) 106.725,62.5 106.837,62.388 106.773,62.452 106.773,62.98 v1(106.725,63.028)
  Bottom Layer w0.2: v1(106.664,53.922) 106.712,53.97 106.712,54.147 106.725,54.16 v1(106.725,63.028)
RUN: RP2040.26 RPI_PICO.30 | length 16.7
  Top Layer w0.2: RP2040.26 112.3,44.7 v1(113.5,43.5) ; v1(117.069,52.805) 117.097,52.833 119.373,52.833 RPI_PICO.30@119.4,52.86
  Bottom Layer w0.2: v1(113.5,43.5) 115.5,45.5 115.5,51.236 v1(117.069,52.805)
SWCLK: RP2040.24 RPI_PICO.41 | length 18.7
  Top Layer w0.2: RPI_PICO.41@107.96,30.23 111.379,33.649 111.379,33.655 112.64,34.916 112.64,43.052 111.5,44.192 RP2040.24
SWDIO: RP2040.25 RPI_PICO.43 | length 16.8
  Top Layer w0.2: RP2040.25 111.9,44.358 113.04,43.218 RPI_PICO.43@113.04,30.23
USB_N: R3.1 RP2040.46 | length 1.9
  Top Layer w0.2: RP2040.46 111.9,54.925 112.149,55.173 R3.1
USB_P: R2.1 RP2040.47 | length 1.8
  Top Layer w0.2: R2.1 111.315,55.173 111.5,54.989 RP2040.47
VREF: R12.1 R13.1 RPI_PICO.35 | length 6.8
  Top Layer w0.2: R13.1 R12.1 116.625,60.9 116.8,61.075 116.8,61.332 117,61.532 v1(117,61.6)
  Bottom Layer w0.2: v1(117,61.6) 118.1,62.7 118.1,64.26 RPI_PICO.35@119.4,65.56
VSYS: C17.2 D1.2 R7.2 R15.2 RPI_PICO.39 U1.2 | length 12
  Top Layer w0.2: U1.2 115.75,68.602 115.75,68.825 115.8,68.875 C17.2
  Top Layer w0.3: R7.2 R15.2 114.762,69.238 115.887,69.238 115.995,69.13 C17.2 ; 115.798,68.602 115.798,68.65 115.8,68.652 C17.2@115.8,68.85 ; C17.2@115.8,68.875 C17.2@115.8,68.85 ; C17.2@115.975,68.875 115.825,68.875 C17.2@115.8,68.85
  Top Layer w0.5: C17.2@115.995,69.13 115.995,71.295 D1.2 116.8,73.12 RPI_PICO.39@119.4,75.72
VUSB: D1.1 R17.2 RPI_PICO.40 USB-C.2 | length 20.1
  Top Layer w0.2: R17.2 112.7,71.35 D1.1
  Top Layer w0.5: v1@108,73.2 108.05,73.25 USB-C.2@108.05,74.5 ; USB-C.2@112.95,74.5 112.95,72.6 D1.1
  Bottom Layer w0.75: v1(108,73.165) v1(112.949,73.165)
  Bottom Layer w1: v1(112.949,73.165) 115.165,73.165 117.5,75.5 117.5,76.36 RPI_PICO.40@119.4,78.26
XIN: C11.1 R9.1 RP2040.21 X1.1 | length 11.6
  Top Layer w0.2: v1(105.241,39.445) 105.802,40.006 X1.1 ; v1(109.989,41.693) 109.989,42.289 C11.1 109.9,42.4 R9.1 109.9,45.2 110.3,45.6 RP2040.21
  Bottom Layer w0.2: v1(105.241,39.445) 106.145,39.445 108.393,41.693 v1(109.989,41.693)
XOUT: R8.2 R9.2 RP2040.20 | length 4.7
  Top Layer w0.2: R8.2 109,43.125 108.925,43.2 109.1,43.375 109.1,43.4 109.5,43.8 109.5,45.4 109.9,45.8 RP2040.20
pads on no net: RPI_PICO.44 U1.6 USB-C.3 USB-C.9 USB-C.12

## Polygon pours and split planes (outlines as drawn)
GND on Top Layer "Top Layer-No Net" (solid, pour order 0): 285 vertices, not listed, extent 108.536,54.834 113.525,78.094
GND on Bottom Layer "NONET_L-01_P-001" (solid, pour order 2): 101,81 120,81 120,30 101,30
GND on Bottom Layer "Bottom Layer-No Net" (solid, pour order 1): 169 vertices, not listed, extent 108.809,75.509 113.091,78.094
GND on Int2 (PWR) "NONET_L-01_P-001" (solid, pour order 3): 101,81 120,81 120,30 101,30
GND on Int1 (GND) "NONET_L-01_P-001" (solid, pour order 4): 101,81 120,81 120,30 101,30

## Other copper
Top Layer:
  pour cut-out: 277 vertices and 0 holes, not listed, extent 108.993,55.292 113.068,77.636
Bottom Layer:
  pour cut-out: 110.159,77.624 110.218,77.624 110.306,77.607 110.434,77.554 110.525,77.516 110.599,77.467 110.711,77.355 110.767,77.299 110.816,77.225 110.854,77.134 110.907,77.006 110.924,76.918 110.924,76.8 110.924,76.682 110.907,76.594 110.854,76.466 110.816,76.375 110.767,76.301 110.655,76.189 110.599,76.133 110.525,76.084 110.434,76.046 110.306,75.993 110.218,75.976 110.1,75.976 109.982,75.976 109.894,75.993 109.766,76.046 109.675,76.084 109.601,76.133 109.489,76.245 109.433,76.301 109.384,76.375 109.346,76.466 109.293,76.594 109.276,76.682 109.276,76.8 109.276,76.918 109.293,77.006 109.346,77.134 109.384,77.225 109.433,77.299 109.545,77.411 109.601,77.467 109.675,77.516 109.766,77.554 109.894,77.607 109.982,77.624 110.041,77.624 110.1,77.636
  pour cut-out: 111.859,77.624 111.918,77.624 112.006,77.607 112.134,77.554 112.225,77.516 112.299,77.467 112.411,77.355 112.467,77.299 112.516,77.225 112.554,77.134 112.607,77.006 112.624,76.918 112.624,76.8 112.624,76.682 112.607,76.594 112.554,76.466 112.516,76.375 112.467,76.301 112.355,76.189 112.299,76.133 112.225,76.084 112.134,76.046 112.006,75.993 111.918,75.976 111.8,75.976 111.682,75.976 111.594,75.993 111.466,76.046 111.375,76.084 111.301,76.133 111.189,76.245 111.133,76.301 111.084,76.375 111.046,76.466 110.993,76.594 110.976,76.682 110.976,76.8 110.976,76.918 110.993,77.006 111.046,77.134 111.084,77.225 111.133,77.299 111.245,77.411 111.301,77.467 111.375,77.516 111.466,77.554 111.594,77.607 111.682,77.624 111.741,77.624 111.8,77.636

## Silkscreen, mask and mechanical layers (free items; w line width, h text height)
Top Overlay:
  drawing of 3 lines, arcs and shapes, not listed
  text "FERNANDO S.M.H.G." at 104.407,32.267 h1.5
Mechanical 1:
  lines w0.2: 100,28.63 100,82 121,82 121,28.63 100,28.63 ; 100,28.63 100,28.63